# Altium PCB SpinASM_single.PcbDoc
Units mm, origin at the board's own origin, x right, y up, seen from the top; angles counter-clockwise.
Board outline 49.03 x 19.5 mm, 2 copper layers (Top Layer, Bottom Layer), stack 1.57 mm thick; 27 components, 24 nets, 120 pads, 102 vias.
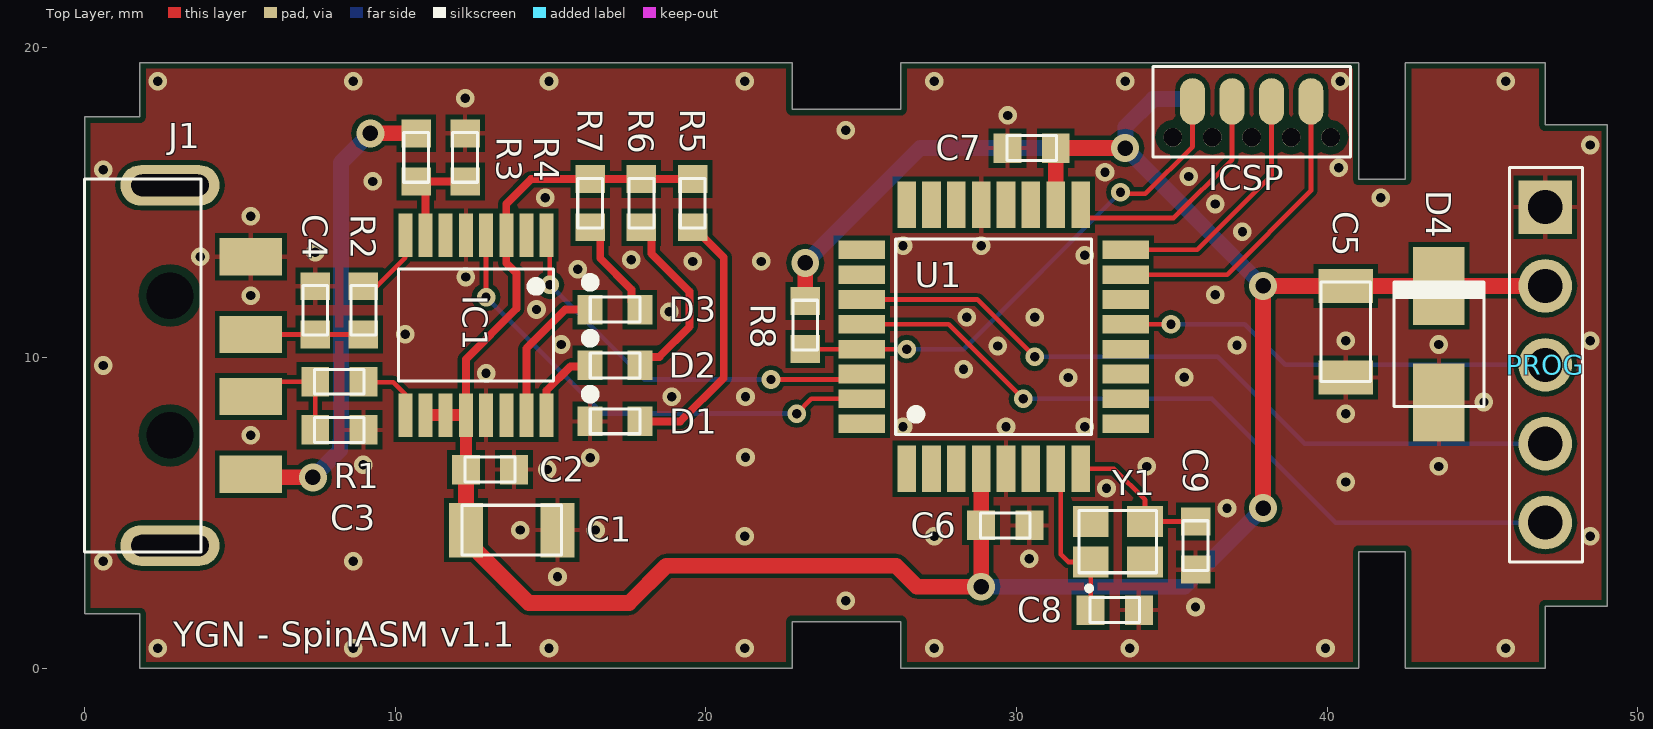
[diagram p0: Top Layer view]
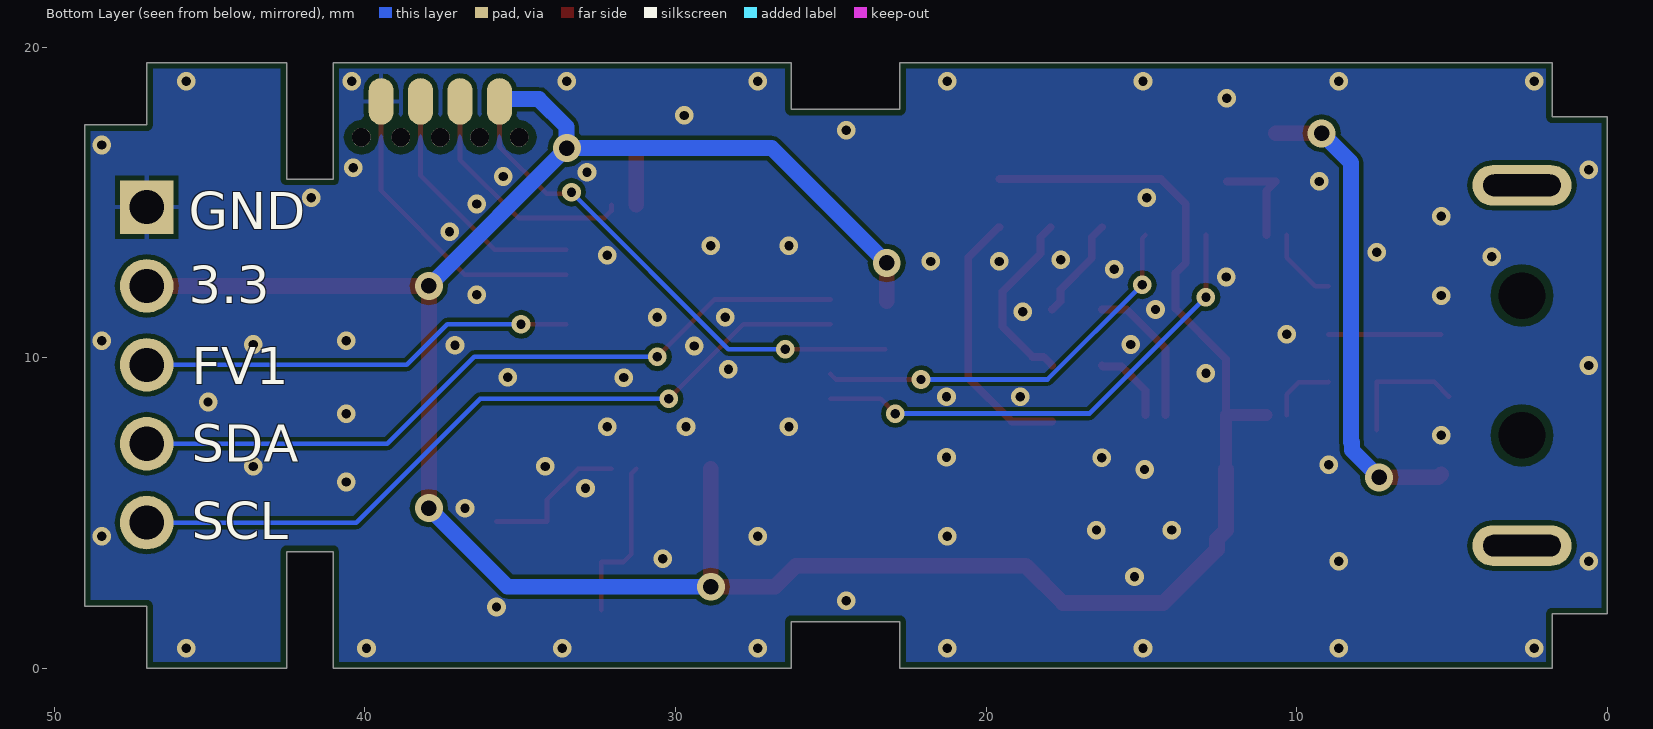
[diagram p1: Bottom Layer view, seen from below]
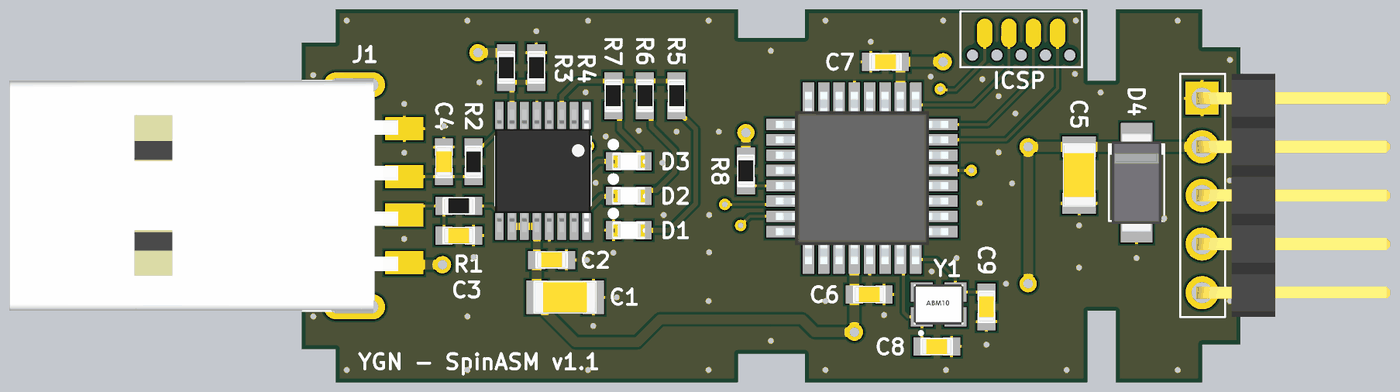
[diagram p2: 3D render of the assembled board from above, using the file's embedded part models]

## Layer stack, top to bottom
Top Solder: solder mask 0.0127, Solder Resist, Dk 3.8
Top Layer: signal copper 0.035
Dielectric: core 1.5, FR-4, Dk 4.5
Bottom Layer: signal copper 0.035
Bottom Solder: solder mask 0.0127, Solder Resist, Dk 3.8

## Board outline
22.775,19.5 22.775,18 26.275,18 26.275,19.5 41.025,19.5 41.025,15.75 42.525,15.75 42.525,19.5 47.025,19.5 47.025,17.5 49.025,17.5 49.025,2 47.025,2 47.025,0 42.525,0 42.525,3.75 41.025,3.75 41.025,0 26.275,0 26.275,1.5 22.775,1.5 22.775,0 1.775,0 1.775,1.75 0,1.75 0,17.75 1.775,17.75 1.775,19.5

## Design rules (kind name [scope] priority, off if disabled: settings)
BoardOutlineClearance [All] p1: gap=0.2 ignorepadtopadclearanceinfootprint=FALSE
Clearance [All] p1: gap=0.127 ignorepadtopadclearanceinfootprint=FALSE except(0: Arc-Text Track-Text SMDPad-Text THPad-Text Via-Text Fill-Text Poly-Text Region-Text Text-Text; 0.152: SMDPad-Fill SMDPad-Poly SMDPad-Region THPad-Fill THPad-Poly THPad-Region Via-Fill Via-Poly Via-Region; 0.25: Arc-Hole Track-Hole SMDPad-Hole THPad-Hole Via-Hole Fill-Hole Poly-Hole Region-Hole Text-Hole)
ComponentClearance [All] p1: gap=0.127 collisioncheckmode=3 verticalgap=0.127 showdistances=TRUE
DiffPairsRouting [All] p1: maxlimit=0.254 minlimit=0.127 mostfreqgap=0.127 toplayer_minwidth=0.127 toplayer_maxwidth=25.4 toplayer_prefwidth=0.127 bottomlayer_minwidth=0.127 bottomlayer_maxwidth=25.4 bottomlayer_prefwidth=0.127 maxuncoupledlength=12.7
Height [All] p1: minheight=0 maxheight=1816.048 prefheight=12.7
HoleSize [All] p1: absolutevalues=TRUE maxlimit=6.3 minlimit=0.3 maxpercent=80.000 minpercent=20.000
HoleToHoleClearance [All] p1: gap=0.25 allowstackedmicrovias=FALSE
MinimumAnnularRing [All] p1: minimumring=0.076
MinimumSolderMaskSliver [All] p1: minsoldermaskwidth=0
PlaneClearance [All] p1: clearance=0.152
PlaneConnect PlaneConnectPowerPads [InPadClass('PowerPads')] p1: planeconnectstyle=Direct reliefexpansion=0.508 reliefentries=4 reliefconductorwidth=0.254 reliefairgap=0.254
PlaneConnect [All] p2: pad.planeconnectstyle=Relief pad.reliefexpansion=0.3 pad.reliefentries=4 pad.reliefconductorwidth=0.152 pad.reliefairgap=0.152 via.planeconnectstyle=Direct via.reliefexpansion=0.3 via.reliefentries=4 via.reliefconductorwidth=0.127 via.reliefairgap=0.127
PolygonConnect PolygonConnectPowerPads [All vs (InPadClass('PowerPads'))] p1: connectstyle=Direct reliefconductorwidth=0.254 reliefentries=4 polygonreliefangle="90 Angle" airgapwidth=0.254
PolygonConnect [All] p2: thpad.connectstyle=Relief thpad.reliefconductorwidth=0.152 thpad.reliefentries=4 thpad.polygonreliefangle="90 Angle" thpad.airgapwidth=0.152 smdpad.connectstyle=Relief smdpad.reliefconductorwidth=0.152 smdpad.reliefentries=4 smdpad.polygonreliefangle="90 Angle" smdpad.airgapwidth=0.152 via.connectstyle=Direct via.reliefconductorwidth=0.127 via.reliefentries=4 via.polygonreliefangle="90 Angle" via.airgapwidth=0.127
RoutingVias [All] p1: holewidth=0.3 width=0.6 viastyle="Through Hole" minholewidth=0.3 minwidth=0.6 maxholewidth=0.6 maxwidth=6.6
SilkToSilkClearance [All] p1 off: silktosilkclearance=0
SilkToSolderMaskClearance [IsPad] p1 off: minsilkscreentomaskgap=0.127 clearancetoexposedcopper=TRUE
SolderMaskExpansion [All] p1: expansion=0.075 istentingtop=FALSE
Width [All] p1: maxlimit=0.508 minlimit=0.127 preferedwidth=0.127 minimp=50.000000 maximp=50.000000 favimp=50.000000
20 further rules are at their usual default settings.

## Components (designator, comment, footprint, x,y, rotation, side; value= is the part's Value field where it differs from the comment)
C1 "10u" CHIP_1206 13.75,4.45 r180 top
C2 "100n" CHIP_0603 13.05,6.4 r0 top
C3 "47p" CHIP_0603 8.2,7.675 r0 top
C4 "47p" CHIP_0603 7.425,11.525 r90 top
C5 "10u" CHIP_1206 40.6,10.835 r90 top
C6 "100n" CHIP_0603 29.64,4.6 r0 top
C7 "100n" CHIP_0603 30.49,16.75 r180 top
C8 "22p" CHIP_0603 33.165,1.875 r0 top
C9 "22p" CHIP_0603 35.765,3.95 r270 top
D1 "GREEN" LED_0603 17.075,7.95 r0 top
D2 "RED" LED_0603 17.075,9.75 r0 top
D3 "RED" LED_0603 17.075,11.55 r0 top
D4 "S1A" DO214 43.6,10.435 r270 top
IC1 "FT230X" TSSOP-16 12.6,11.05 r270 top
ICSP "J_SOICBITE" SOICBITE 37.575,19 r180 top
J1 "USB_MALE" USB_MALE 3.025,9.75 r270 top locked
PROG "10129379-905001BLF" HEADER_5PINS_MALE_90 47.025,14.85 r270 top locked
R1 "27R" CHIP_R_0603 8.2,9.225 r0 top
R2 "27R" CHIP_R_0603 8.975,11.525 r90 top
R3 "4.7k" CHIP_R_0603 10.675,16.45 r90 top
R4 "10k" CHIP_R_0603 12.25,16.45 r270 top
R5 "330R" CHIP_R_0603 19.575,14.975 r270 top
R6 "330R" CHIP_R_0603 17.925,14.975 r270 top
R7 "330R" CHIP_R_0603 16.275,14.975 r270 top
R8 "10k" CHIP_R_0603 23.2,11.05 r270 top
U1 "ATMEGA328PB" TQFP32 29.265,10.675 r90 top
Y1 "ABM10" ABM10-167 33.265,4.075 r0 top

## Footprints (in the part's own frame and the unit in brackets; to place one, negate y for a bottom-side part, rotate by r counter-clockwise, add the part's x,y. Pads: shape width x height; smd on the part's side, far side on the other; paste and mask are expansions set on the pad)
ABM10-167 [mm]
  rect 1.15x1 smd: 1(-0.875,-0.65) 2(0.875,0.65) ""(-0.875,0.65) ""(0.875,-0.65)
  silkscreen extent -1.25,-1.56 1.25,1, body extent -1.3,-1.05 1.3,1.05, height 0.7
CHIP_0603 [mm] "Chip Capacitor, 2-Leads, Body 1.60x0.80mm, IPC Medium Density"
  rect 0.9x0.95 smd: 1(-0.775,0) 2(0.775,0)
  silkscreen extent -0.8,-0.4 0.8,0.4, body extent -0.75,-0.4 0.75,0.4, height 0.65
CHIP_1206 [mm] "Chip Capacitor, 2-Leads, Body 3.20x1.60mm, IPC Medium Density"
  rect 1.1x1.75 smd: 1(-1.475,0) 2(1.475,0)
  silkscreen extent -1.6,-0.8 1.6,0.8, body extent -1.6,-0.8 1.6,0.8, height 1.05
CHIP_R_0603 [mm] "Chip Resistor, 2-Leads, Body 1.60x0.80mm, IPC Medium Density"
  rect 0.9x0.95 smd: 1(-0.775,0) 2(0.775,0)
  silkscreen extent -0.8,-0.4 0.8,0.4, body extent -0.75,-0.4 0.75,0.4, height 0.63
DO214 [mm] "Molded Diode, 2-Leads, Body 4.30x2.63mm, IPC Medium Density"
  rect 2.5x1.65 smd: 1(-1.875,0) 2(1.875,0)
  silkscreen extent -2,-1.45 2,1.45, body extent -2.6,-1.3 2.6,1.3, height 2.4
HEADER_5PINS_MALE_90 [mm]
  rect 1.725x1.725 hole 1.1: 1(0,0)
  round 1.725 hole 1.1: 2(2.54,0) 3(5.08,0) 4(7.62,0) 5(10.16,0)
  silkscreen extent -1.27,-1.14 11.43,1.2, body extent -1.27,-0.3 11.43,9.83, height 2.51
LED_0603 [mm]
  rect 0.8x0.95 smd: 1(-0.8,0) 2(0.8,0)
  silkscreen extent -0.9,-0.4 0.81,0.97, body extent -0.8,-0.38 0.85,0.35, height 0.68
SOICBITE [mm]
  rrect100% 0.8x1.5 smd paste-999: 1(1.905,0.75) 2(0.635,0.75) 3(-0.635,0.75) 4(-1.905,0.75)
  rrect100% 0.8x1.5 smd far side: 5(-1.905,0.75) 6(-0.635,0.75) 7(0.635,0.75)
  rrect100% 0.8x1.5 smd far side paste+0: 8(1.905,0.75)
  round 0.6 hole 0.6 unplated: MH1(-2.54,1.905) MH2(-1.27,1.905) MH3(0,1.905) MH4(1.27,1.905) MH5(2.54,1.905)
  silkscreen extent -3.18,-0.38 3.17,2.54
TQFP32 [mm]
  rect 1.5x0.6 smd: 1(-4.25,2.8) 2(-4.25,2) 3(-4.25,1.2) 4(-4.25,0.4) 5(-4.25,-0.4) 6(-4.25,-1.2) 7(-4.25,-2) 8(-4.25,-2.8) 17(4.25,-2.8) 18(4.25,-2) 19(4.25,-1.2) 20(4.25,-0.4) 21(4.25,0.4) 22(4.25,1.2) 23(4.25,2) 24(4.25,2.8)
  rect 0.6x1.5 smd: 9(-2.8,-4.25) 10(-2,-4.25) 11(-1.2,-4.25) 12(-0.4,-4.25) 13(0.4,-4.25) 14(1.2,-4.25) 15(2,-4.25) 16(2.8,-4.25) 25(2.8,4.25) 26(2,4.25) 27(1.2,4.25) 28(0.4,4.25) 29(-0.4,4.25) 30(-1.2,4.25) 31(-2,4.25) 32(-2.8,4.25)
  silkscreen extent -3.15,-3.15 3.15,3.15, body extent -4.5,-4.5 4.5,4.5, height 1.2
TSSOP-16 [mm] "TSOP, 16-Leads, Body 4.95x4.35mm, Pitch 0.65mm, IPC Medium Density"
  rect 1.4x0.45 smd: 1(-2.9,2.275) 2(-2.9,1.625) 3(-2.9,0.975) 4(-2.9,0.325) 5(-2.9,-0.325) 6(-2.9,-0.975) 7(-2.9,-1.625) 8(-2.9,-2.275) 9(2.9,-2.275) 10(2.9,-1.625) 11(2.9,-0.975) 12(2.9,-0.325) 13(2.9,0.325) 14(2.9,0.975) 15(2.9,1.625) 16(2.9,2.275)
  silkscreen extent -1.8,-2.5 1.8,2.5, body extent -3.2,-2.5 3.2,2.5, height 1.2
USB_MALE [mm]
  rect 1.2x2 smd paste-99: 1(3.5,2.325) 2(1,2.325) 3(-1,2.325) 4(-3.5,2.325)
  oval 1.3x3.2 hole 0.7 slot 2.5 at 90 deg: 5(-5.8,-0.275) 5(5.8,-0.275)
  round 0.6 hole 1.5 unplated: ""(-2.25,-0.275) ""(2.25,-0.275)
  silkscreen extent -6,-3.03 6,0.72, body extent -6.23,-18.28 6.2,3.33, height 4

## Part data
C1 C5: library part TMK316B7106KL-TD, "CAP CER 10uF 25V X7R 1206", Capacitance=10uF, Case Code (Imperial)=1206, Case Code (Metric)=3216, Dielectric=X7R, Manufacturer="Taiyo Yuden", Max Operating Temperature=125°C, Min Operating Temperature=-55°C, Package Quantity=1, Resistor Type=Ceramic, Supplier Part Number 1=2113073, Tolerance=10%, Voltage Rating=25V, Case/Package=1206, Category="Ceramic Capacitors", ComponentLink1Description=https://datasheet.ciiva.com/15922/582tmk316ab7106kl-t-15922403.pdf?src-supplier=Onlinecomponents.com, ComponentLink1URL=https://datasheet.ciiva.com/15922/582tmk316ab7106kl-t-15922403.pdf?src-supplier=Onlinecomponents.com, ComponentLink2Description=https://datasheet.ciiva.com/7975/1784422-7975593.pdf?src-supplier=Element14, ComponentLink2URL=https://datasheet.ciiva.com/7975/1784422-7975593.pdf?src-supplier=Element14, ComponentLink3Description=https://datasheet.ciiva.com/30123/25tmk316ab7106kl-t-30123726.pdf?src-supplier=Onlinecomponents.com, ComponentLink3URL=https://datasheet.ciiva.com/30123/25tmk316ab7106kl-t-30123726.pdf?src-supplier=Onlinecomponents.com, ComponentLink4Description=https://datasheet.ciiva.com/7975/mlcc-all-e-7975834.pdf?src-supplier=Element14, ComponentLink4URL=https://datasheet.ciiva.com/7975/mlcc-all-e-7975834.pdf?src-supplier=Element14, ComponentLink5Description=https://datasheet.ciiva.com/139/mlcc-all-e-139531.pdf?src-supplier=Digi-Key, ComponentLink5URL=https://datasheet.ciiva.com/139/mlcc-all-e-139531.pdf?src-supplier=Digi-Key, ComponentLink6Description=https://datasheet.ciiva.com/22748/1481447-22748971.pdf?src-supplier=Element14, ComponentLink6URL=https://datasheet.ciiva.com/22748/1481447-22748971.pdf?src-supplier=Element14, ComponentLink7Description=https://datasheet.ciiva.com/139/mlcc-all-e-139532.pdf?src-supplier=Digi-Key, ComponentLink7URL=https://datasheet.ciiva.com/139/mlcc-all-e-139532.pdf?src-supplier=Digi-Key, ComponentLink8Description=https://datasheet.ciiva.com/139/mlcc-all-e-139533.pdf?src-supplier=Digi-Key, ComponentLink8URL=https://datasheet.ciiva.com/139/mlcc-all-e-139533.pdf?src-supplier=Digi-Key, Height=1.6mm, Length=0.126inch, Manufacturer Part Number=TMK316B7106KL-TD, Mount="Surface Mount", Number of Pins=2, Packaging="Tape and Reel", Price=0.149, REACH SVHC=Unknown, RoHS=Yes, Stock=588931, Supplier 1=Farnell, Termination=SMD/SMT, Thickness=0.071inch, Voltage Rating (DC)=25V, Weight=0.000571oz, Width=1.6mm
C2 C6 C7: library part MC0603B104K500CT, "CAP CER 100NF 50V X7R 0603", Capacitance=100nF, Case Code (Imperial)=0603, Case Code (Metric)=1608, Dielectric=X7R, Manufacturer=Multicomp, Max Operating Temperature=125°C, Min Operating Temperature=-55°C, Supplier Part Number 1=1759122, Tolerance=10%, Voltage Rating=50V, Case/Package=0603, ComponentLink1Description=https://datasheet.ciiva.com/22686/1901289-22686278.pdf?src-supplier=Element14, ComponentLink1URL=https://datasheet.ciiva.com/22686/1901289-22686278.pdf?src-supplier=Element14, ComponentLink2Description=https://datasheet.ciiva.com/22686/1901289-22686279.pdf?src-supplier=Element14, ComponentLink2URL=https://datasheet.ciiva.com/22686/1901289-22686279.pdf?src-supplier=Element14, ComponentLink3Description=https://datasheet.ciiva.com/22648/1901289-22648411.pdf?src-supplier=Element14, ComponentLink3URL=https://datasheet.ciiva.com/22648/1901289-22648411.pdf?src-supplier=Element14, Manufacturer Part Number=MC0603B104K500CT, Number of Pins=2, Packaging="Cut Tape", Price=0.0458, REACH SVHC=Unknown, RoHS=Yes, Stock 1=1057763, Supplier 1=Farnell, Voltage Rating (DC)=50V
C3 C4: library part MC0603N470J500CT, "CAP CER 47PF 50V C0G/NP0 0603", Capacitance=47pF, Case Code (Imperial)=0603, Case Code (Metric)=1608, Dielectric=C0G, Manufacturer=Multicomp, Max Operating Temperature=125°C, Min Operating Temperature=-55°C, Supplier Part Number 1=1759062, Temperature Coefficient=30ppm/°C, Tolerance=5%, Voltage Rating=50V, Case/Package=0603, ComponentLink1Description=https://datasheet.ciiva.com/22648/1901289-22648503.pdf?src-supplier=Element14, ComponentLink1URL=https://datasheet.ciiva.com/22648/1901289-22648503.pdf?src-supplier=Element14, ComponentLink2Description=https://datasheet.ciiva.com/22682/1901289-22682812.pdf?src-supplier=Element14, ComponentLink2URL=https://datasheet.ciiva.com/22682/1901289-22682812.pdf?src-supplier=Element14, ComponentLink3Description=https://datasheet.ciiva.com/22682/1901289-22682813.pdf?src-supplier=Element14, ComponentLink3URL=https://datasheet.ciiva.com/22682/1901289-22682813.pdf?src-supplier=Element14, Manufacturer Part Number=MC0603N470J500CT, Number of Pins=2, Packaging="Tape and Reel", Price=0.02, Pricing="10=0.0246, 100=0.0199, 500=0.0123, 1000=0.0097, 2000=0.0089 (EUR)", REACH SVHC=Unknown, RoHS=Yes, Stock=148629, Supplier 1=Farnell, Voltage Rating (DC)=50V, Width=0.8mm
C8 C9: library part MC0603N220J500CT, "CAP CER 22PF 50V C0G/NP0 0603", Capacitance=22pF, Case Code (Imperial)=0603, Case Code (Metric)=1608, Dielectric=C0G, Manufacturer=Multicomp, Max Operating Temperature=125°C, Min Operating Temperature=-55°C, Supplier Part Number 1=1759057, Temperature Coefficient=30ppm/°C, Tolerance=5%, Voltage Rating=50V, Case/Package=0603, Category="Ceramic Capacitors", ComponentLink1Description=https://datasheet.ciiva.com/22648/1901289-22648486.pdf?src-supplier=Element14, ComponentLink1URL=https://datasheet.ciiva.com/22648/1901289-22648486.pdf?src-supplier=Element14, Manufacturer Part Number=MC0603N220J500CT, Number of Pins=2, Packaging="Cut Tape", Price=0.024, REACH SVHC=Unknown, RoHS=Yes, Stock=53792, Supplier 1=Farnell, Voltage Rating (DC)=50V, Width=0.8mm
D1: library part APT1608SGC, "LED GREEN CLEAR CHIP SMD", Case Code (Imperial)=0603, Case Code (Metric)=1608, Color=Green, Forward Current=20mA, Forward Voltage=2.2V, Lens Color=Clear, Manufacturer=Kingbright, Max Operating Temperature=85°C, Min Operating Temperature=-40°C, Package Quantity=2000, Supplier Part Number 1=604-APT1608SGC, Case/Package=0603, Category=LEDs, ComponentLink1Description=https://datasheet.ciiva.com/2113/apt1608sgc-2113808.pdf?src-supplier=Digi-Key, ComponentLink1URL=https://datasheet.ciiva.com/2113/apt1608sgc-2113808.pdf?src-supplier=Digi-Key, ComponentLink2Description=https://datasheet.ciiva.com/12400/apt1608sgc-32861-12400932.pdf?src-supplier=Mouser, ComponentLink2URL=https://datasheet.ciiva.com/12400/apt1608sgc-32861-12400932.pdf?src-supplier=Mouser, ComponentLink3Description=https://datasheet.ciiva.com/14603/70062839-14603927.pdf?src-supplier=Allied+Electronics, ComponentLink3URL=https://datasheet.ciiva.com/14603/70062839-14603927.pdf?src-supplier=Allied+Electronics, Dominant Wavelength=568nm, Height=0.75mm, Illumination Color=Green, Lead Free="Lead Free", Length=1.6mm, Lens Style=Clear,Flat, Luminous Intensity=15mcd, Manufacturer Part Number=APT1608SGC, Mount="Surface Mount", Number of LEDs=1, Number of Pins=2, Packaging="Tape and Reel", Price=0.047, Pricing="1=0.17000, 10=0.10700, 100=0.05600, 1000=0.05100, 2000=0.04400, 10000=0.03700 (USD)", RoHS=Yes, Stock=233491, Supplier 1=Mouser, Test Current=20mA, Viewing Angle=120°, Wavelength=568nm, Width=0.8mm
D2 D3: library part APT1608EC, "LED RED CLEAR CHIP SMD", Case Code (Imperial)=0603, Case Code (Metric)=1608, Color=Red, Forward Current=20mA, Forward Voltage=2V, Lens Color=Clear, Manufacturer=Kingbright, Max Operating Temperature=85°C, Min Operating Temperature=-40°C, Package Quantity=2000, Supplier Part Number 1=604-APT1608EC, Case/Package=0603, Category=LEDs, ComponentLink1Description=https://datasheet.ciiva.com/2113/apt1608ec-2113818.pdf?src-supplier=Digi-Key, ComponentLink1URL=https://datasheet.ciiva.com/2113/apt1608ec-2113818.pdf?src-supplier=Digi-Key, ComponentLink2Description=https://datasheet.ciiva.com/12400/apt1608ec-34957-12400703.pdf?src-supplier=Mouser, ComponentLink2URL=https://datasheet.ciiva.com/12400/apt1608ec-34957-12400703.pdf?src-supplier=Mouser, ComponentLink3Description=https://datasheet.ciiva.com/2113/apt1608ec-2113819.pdf?src-supplier=Digi-Key, ComponentLink3URL=https://datasheet.ciiva.com/2113/apt1608ec-2113819.pdf?src-supplier=Digi-Key, ComponentLink4Description=https://datasheet.ciiva.com/2113/apt1608ec-2113820.pdf?src-supplier=Digi-Key, ComponentLink4URL=https://datasheet.ciiva.com/2113/apt1608ec-2113820.pdf?src-supplier=Digi-Key, ComponentLink5Description=https://datasheet.ciiva.com/14604/70062836-14604396.pdf?src-supplier=Allied+Electronics, ComponentLink5URL=https://datasheet.ciiva.com/14604/70062836-14604396.pdf?src-supplier=Allied+Electronics, ComponentLink6Description=https://datasheet.ciiva.com/16412/apt1608ec-16412172.pdf?src-supplier=Future+Electronics, ComponentLink6URL=https://datasheet.ciiva.com/16412/apt1608ec-16412172.pdf?src-supplier=Future+Electronics, Dominant Wavelength=625nm, Height=0.75mm, Illumination Color=Red, Lead Free="Lead Free", Length=1.6mm, Lens Style=Clear,Flat, Luminous Intensity=12mcd, Manufacturer Part Number=APT1608EC, Mount="Surface Mount", Number of LEDs=1, Number of Pins=2, Packaging="Tape and Reel", Price=0.053, Pricing="1=0.16000, 10=0.11500, 100=0.06200, 1000=0.04300, 2000=0.03600, 10000=0.03600 (USD)", RoHS=Yes, Stock=24294, Supplier 1=Mouser, Test Current=20mA, Viewing Angle=120°, Wavelength=625nm, Width=0.8mm
D4: "DIODE GEN PURP 50V 1A SMA", Average Rectified Current=1A, Capacitance=12pF, Case/Package=SMA, Forward Voltage=1.1V, Manufacturer="ON Semiconductor / Fairchild", Max Forward Surge Current (Ifsm)=30A, Max Operating Temperature=150°C, Max Repetitive Reverse Voltage (Vrrm)=50V, Max Surge Current=40A, Min Operating Temperature=-55°C, Package Quantity=1, Peak Reverse Current=1uA, Power Dissipation=1.4W, Supplier Part Number 1=9843868, ComponentLink1Description=https://datasheet.ciiva.com/910/s1a-910480.pdf?src-supplier=Avnet, ComponentLink1URL=https://datasheet.ciiva.com/910/s1a-910480.pdf?src-supplier=Avnet, ComponentLink2Description=https://datasheet.ciiva.com/23683/1730038-23683616.pdf?src-supplier=Newark, ComponentLink2URL=https://datasheet.ciiva.com/23683/1730038-23683616.pdf?src-supplier=Newark, ComponentLink3Description=https://datasheet.ciiva.com/4452/s1a-191336-4452662.pdf?src-supplier=Mouser, ComponentLink3URL=https://datasheet.ciiva.com/4452/s1a-191336-4452662.pdf?src-supplier=Mouser, ComponentLink4Description=https://datasheet.ciiva.com/25624/0900766b80f9b629-25624903.pdf?src-supplier=RSComponents, ComponentLink4URL=https://datasheet.ciiva.com/25624/0900766b80f9b629-25624903.pdf?src-supplier=RSComponents, ComponentLink5Description=https://datasheet.ciiva.com/916/s1a-916898.pdf?src-supplier=Digi-Key, ComponentLink5URL=https://datasheet.ciiva.com/916/s1a-916898.pdf?src-supplier=Digi-Key, ComponentLink6Description=https://datasheet.ciiva.com/916/s1a-916899.pdf?src-supplier=Digi-Key, ComponentLink6URL=https://datasheet.ciiva.com/916/s1a-916899.pdf?src-supplier=Digi-Key, ComponentLink7Description=https://datasheet.ciiva.com/916/s1a-916900.pdf?src-supplier=Digi-Key, ComponentLink7URL=https://datasheet.ciiva.com/916/s1a-916900.pdf?src-supplier=Digi-Key, ComponentLink8Description=https://datasheet.ciiva.com/16800/s1a-16800103.pdf?src-supplier=Future+Electronics, ComponentLink8URL=https://datasheet.ciiva.com/16800/s1a-16800103.pdf?src-supplier=Future+Electronics, ComponentLink9Description=https://datasheet.ciiva.com/28469/1766308-28469031.pdf?src-supplier=Element14, ComponentLink9URL=https://datasheet.ciiva.com/28469/1766308-28469031.pdf?src-supplier=Element14, ComponentLink10Description=https://datasheet.ciiva.com/26231/s1k-26231832.pdf?src-supplier=Avnet+Europe, ComponentLink10URL=https://datasheet.ciiva.com/26231/s1k-26231832.pdf?src-supplier=Avnet+Europe, ComponentLink11Description=https://datasheet.ciiva.com/16474/s1k-16474283.pdf?src-supplier=Avnet+Asia, ComponentLink11URL=https://datasheet.ciiva.com/16474/s1k-16474283.pdf?src-supplier=Avnet+Asia, Contact Plating=Tin, Current Rating=1A, Element Configuration=Single, Forward Current=1A, Lead Free="Lead Free", Manufacturer Part Number=S1A, Max Reverse Voltage (DC)=50V, Mount="Surface Mount", Number of Pins=2, Output Current=1A, Packaging="Tape and Reel", Peak Non-Repetitive Surge Current=30A, Polarity=Standard, Price=0.072, Pricing="5=0.184, 25=0.179, 100=0.0727, 250=0.0669, 500=0.0667, 1000=0.0364, 5000=0.0293 (EUR)", Radiation Hardening=No, REACH SVHC="No SVHC", Recovery Time=1800ns, Reverse Recovery Time=1.8us, Reverse Voltage=50V, RoHS=Yes, Stock=34555, Supplier 1=Farnell, Voltage Rating (DC)=50V, Weight=0.106g, Width=5.28mm
IC1: library part FT230XS-R, "USB-to-UART 1-CH 512byte FIFO 5V 16-Pin SSOP T/R", Case/Package=SSOP, Manufacturer=FTDI, Max Operating Temperature=85°C, Max Supply Voltage=5.5V, Min Operating Temperature=-40°C, Min Supply Voltage=2.97V, Operating Supply Current=8mA, Operating Supply Voltage=5V, Package Quantity=3000, Supplier Part Number 1=2081321, Category="Interface ICs", ComponentLink1Description=https://datasheet.ciiva.com/1787/ds-ft230x-1787315.pdf?src-supplier=Digi-Key, ComponentLink1URL=https://datasheet.ciiva.com/1787/ds-ft230x-1787315.pdf?src-supplier=Digi-Key, ComponentLink2Description=https://datasheet.ciiva.com/4787/ds-ft230x-5395-4787571.pdf?src-supplier=Mouser, ComponentLink2URL=https://datasheet.ciiva.com/4787/ds-ft230x-5395-4787571.pdf?src-supplier=Mouser, ComponentLink3Description=https://datasheet.ciiva.com/30478/0900766b811020cb-30478167.pdf?src-supplier=RSComponents, ComponentLink3URL=https://datasheet.ciiva.com/30478/0900766b811020cb-30478167.pdf?src-supplier=RSComponents, ComponentLink4Description=https://datasheet.ciiva.com/1787/ft-x-series-1787316.pdf?src-supplier=Digi-Key, ComponentLink4URL=https://datasheet.ciiva.com/1787/ft-x-series-1787316.pdf?src-supplier=Digi-Key, ComponentLink5Description=https://datasheet.ciiva.com/1787/ft-x-series-1787317.pdf?src-supplier=Digi-Key, ComponentLink5URL=https://datasheet.ciiva.com/1787/ft-x-series-1787317.pdf?src-supplier=Digi-Key, Data Rate=12Mbps, Height=0.059inch, Interface=UART,USB, Length=5mm, Manufacturer Part Number=FT230XS-R, Mount="Surface Mount", Number of Channels=1, Number of Pins=16, Packaging="Tape and Reel", Price=1.73, RoHS=Yes, Stock 1=45264, Supplier 1=Farnell, Weight=0.004586oz, Width=0.157inch
ICSP: Package=SOICBITE, DeviceSetName=SOICBITE, GateName_1=G$1, LibraryName=SOICbite_Eagle, SymbolName_1=SOICBITE
J1: library part KUSBX-SMT2AP5S-W, "Conn USB Type A PL 4 POS 2mm Solder ST SMD 4 Terminal 1 Port", Color=Black, Current Rating=1A, Flammability Rating="UL94 V-0", Insulation Resistance=1GR, Manufacturer=Kycon, Package Quantity=100, Category="USB Connectors", ComponentLink1Description=https://datasheet.ciiva.com/12494/kusbx-371999-12494840.pdf?src-supplier=Mouser, ComponentLink1URL=https://datasheet.ciiva.com/12494/kusbx-371999-12494840.pdf?src-supplier=Mouser, Connector Type=USB,Plug, Contact Material=Bronze, Contact Plating=Gold, Gender=Male, Housing Material=Thermoplastic, Manufacturer Part Number=KUSBX-SMT2AP5S-W, Mount="Surface Mount", Number of Contacts=4, Number of Ports=1, Number of Positions=4, Orientation=Straight, Packaging=Tray, Pitch=2mm, Price=0.735, Radiation Hardening=No, RoHS=Yes, Stock 1=8377, Supplier 1=Mouser, Termination=SMD/SMT
PROG: "Conn Unshrouded Header HDR 5 POS 2.54mm Solder RA Thru-Hole Poly Bag", Manufacturer=ICC, Supplier Part Number 1=649-1012937990501BLF, ComponentLink1Description=http://datasheet.octopart.com/10129379-905001BLF-Amphenol-ICC-datasheet-100454231.pdf?src-supplier=Newark, ComponentLink1URL=http://datasheet.octopart.com/10129379-905001BLF-Amphenol-ICC-datasheet-100454231.pdf?src-supplier=Newark, ComponentLink2Description=http://datasheet.octopart.com/10129379-905001BLF-ICC-datasheet-100454231.pdf?src-supplier=Newark, ComponentLink2URL=http://datasheet.octopart.com/10129379-905001BLF-ICC-datasheet-100454231.pdf?src-supplier=Newark, Manufacturer Part Number=10129379-905001BLF, Price=0.154, Pricing="1=0.26000, 10=0.18200, 100=0.15000, 1000=0.12500, 2500=0.11200, 10000=0.09600, 25000=0.09500, 50000=0.09300, 100000=0.08900 (USD)", Stock=5866, Supplier 1=Mouser
R1 R2: library part CRCW060327R0FKEA, "RES SMD 27 OHM 1% 1/10W 0603", Case Code (Imperial)=0603, Case Code (Metric)=1608, Manufacturer=Vishay, Max Operating Temperature=155°C, Min Operating Temperature=-55°C, Package Quantity=5000, Power Rating=100mW, Supplier Part Number 1=2141211, Temperature Coefficient=100ppm/°C, Tolerance=1%, Voltage Rating=75V, Case/Package=0603, Category="Chip SMD Resistors", ComponentLink1Description=https://datasheet.ciiva.com/11809/0900766b80d98afc-11809194.pdf?src-supplier=RSComponents, ComponentLink1URL=https://datasheet.ciiva.com/11809/0900766b80d98afc-11809194.pdf?src-supplier=RSComponents, ComponentLink2Description=https://datasheet.ciiva.com/5541/dcrcwe3-109170-5541782.pdf?src-supplier=Mouser, ComponentLink2URL=https://datasheet.ciiva.com/5541/dcrcwe3-109170-5541782.pdf?src-supplier=Mouser, ComponentLink3Description=https://datasheet.ciiva.com/7792/125364-7792167.pdf?src-supplier=Element14, ComponentLink3URL=https://datasheet.ciiva.com/7792/125364-7792167.pdf?src-supplier=Element14, ComponentLink4Description=https://datasheet.ciiva.com/22704/1697337-22704440.pdf?src-supplier=Element14, ComponentLink4URL=https://datasheet.ciiva.com/22704/1697337-22704440.pdf?src-supplier=Element14, ComponentLink5Description=https://datasheet.ciiva.com/7672/1697337-7672889.pdf?src-supplier=Element14, ComponentLink5URL=https://datasheet.ciiva.com/7672/1697337-7672889.pdf?src-supplier=Element14, ComponentLink6Description=https://datasheet.ciiva.com/7672/1697337-7672890.pdf?src-supplier=Element14, ComponentLink6URL=https://datasheet.ciiva.com/7672/1697337-7672890.pdf?src-supplier=Element14, ComponentLink7Description=https://datasheet.ciiva.com/16882/dcrcwe3-16882811.pdf?src-supplier=Avnet+Europe, ComponentLink7URL=https://datasheet.ciiva.com/16882/dcrcwe3-16882811.pdf?src-supplier=Avnet+Europe, ComponentLink8Description=https://datasheet.ciiva.com/22870/70201119-22870860.pdf?src-supplier=Allied+Electronics, ComponentLink8URL=https://datasheet.ciiva.com/22870/70201119-22870860.pdf?src-supplier=Allied+Electronics, ComponentLink9Description=https://datasheet.ciiva.com/16498/dcrcwe3-16498302.pdf?src-supplier=Future+Electronics, ComponentLink9URL=https://datasheet.ciiva.com/16498/dcrcwe3-16498302.pdf?src-supplier=Future+Electronics, ComponentLink10Description=https://datasheet.ciiva.com/16780/70201119-16780479.pdf?src-supplier=Allied+Electronics, ComponentLink10URL=https://datasheet.ciiva.com/16780/70201119-16780479.pdf?src-supplier=Allied+Electronics, Composition="Thick Film", Contact Plating=Tin, Depth=0.85mm, Height=0.45mm, Lead Free="Lead Free", Length=1.55mm, Manufacturer Part Number=CRCW060327R0FKEA, Military Standard=Not, Mount="Surface Mount", Number of Pins=2, Packaging="Tape and Reel", Price=0.0165, Radiation Hardening=No, REACH SVHC=Unknown, Resistance=27R, RoHS=Yes, Stock 1=1183, Supplier 1=Farnell, Termination=SMD/SMT, Voltage Rating (DC)=75V, Weight=7.1E-05oz, Width=0.85mm
R3: library part CRCW06034K70FKEA, "RES SMD 4.7K OHM 1% 1/10W 0603", Case Code (Imperial)=0603, Case Code (Metric)=1608, Manufacturer=Vishay, Max Operating Temperature=155°C, Min Operating Temperature=-55°C, Package Quantity=5000, Power Rating=100mW, Resistance=4.7kR, Supplier Part Number 1=1469807, Temperature Coefficient=100ppm/°C, Tolerance=1%, Voltage Rating=75V, Case/Package=0603, ComponentLink1Description=https://datasheet.ciiva.com/11809/0900766b80d98afc-11809859.pdf?src-supplier=RSComponents, ComponentLink1URL=https://datasheet.ciiva.com/11809/0900766b80d98afc-11809859.pdf?src-supplier=RSComponents, ComponentLink2Description=https://datasheet.ciiva.com/8079/1697337-8079646.pdf?src-supplier=Element14, ComponentLink2URL=https://datasheet.ciiva.com/8079/1697337-8079646.pdf?src-supplier=Element14, ComponentLink3Description=https://datasheet.ciiva.com/15159/getdatasheetpartid-33073-15159382.pdf?src-supplier=Verical, ComponentLink3URL=https://datasheet.ciiva.com/15159/getdatasheetpartid-33073-15159382.pdf?src-supplier=Verical, ComponentLink4Description=https://datasheet.ciiva.com/16199/dcrcwe3-16199366.pdf?src-supplier=Future+Electronics, ComponentLink4URL=https://datasheet.ciiva.com/16199/dcrcwe3-16199366.pdf?src-supplier=Future+Electronics, ComponentLink5Description=https://datasheet.ciiva.com/16764/70201119-16764918.pdf?src-supplier=Allied+Electronics, ComponentLink5URL=https://datasheet.ciiva.com/16764/70201119-16764918.pdf?src-supplier=Allied+Electronics, ComponentLink6Description=https://datasheet.ciiva.com/16520/dcrcwe3-16520616.pdf?src-supplier=Avnet+Asia, ComponentLink6URL=https://datasheet.ciiva.com/16520/dcrcwe3-16520616.pdf?src-supplier=Avnet+Asia, ComponentLink7Description=https://datasheet.ciiva.com/16724/70201119-16724106.pdf?src-supplier=Allied+Electronics, ComponentLink7URL=https://datasheet.ciiva.com/16724/70201119-16724106.pdf?src-supplier=Allied+Electronics, ComponentLink8Description=https://datasheet.ciiva.com/26314/fld-crcw-e3-data-en-26314735.pdf?src-supplier=Distrelec, ComponentLink8URL=https://datasheet.ciiva.com/26314/fld-crcw-e3-data-en-26314735.pdf?src-supplier=Distrelec, Composition="Thick Film", Contact Plating=Tin, Depth=0.85mm, Height=0.45mm, Lead Free="Lead Free", Length=1.55mm, Manufacturer Part Number=CRCW06034K70FKEA, Military Standard=Not, Mount="Surface Mount", Packaging="Tape and Reel", Price=0.0131, Pricing="10=0.0169, 100=0.013, 500=0.0113, 1000=0.0074 (EUR)", REACH SVHC=Unknown, RoHS=Yes, Stock=238464, Supplier 1=Farnell, Termination=SMD/SMT, Voltage Rating (DC)=75V, Weight=7.1E-05oz, Width=0.85mm
R4 R8: library part CRCW060310K0FKEA, "RES SMD 10K OHM 1% 1/10W 0603", Case Code (Imperial)=0603, Case Code (Metric)=1608, Manufacturer=Vishay, Max Operating Temperature=155°C, Max Power Dissipation=100mW, Min Operating Temperature=-55°C, Package Quantity=10, Resistance=10kR, Supplier Part Number 1=1469748, Temperature Coefficient=100ppm/°C, Tolerance=1%, Voltage Rating=75V, Case/Package=0603, ComponentLink1Description=https://datasheet.ciiva.com/11809/0900766b80d98afc-11809037.pdf?src-supplier=RSComponents, ComponentLink1URL=https://datasheet.ciiva.com/11809/0900766b80d98afc-11809037.pdf?src-supplier=RSComponents, ComponentLink2Description=https://datasheet.ciiva.com/16886/dcrcw-16886037.pdf?src-supplier=Avnet+Europe, ComponentLink2URL=https://datasheet.ciiva.com/16886/dcrcw-16886037.pdf?src-supplier=Avnet+Europe, ComponentLink3Description=https://datasheet.ciiva.com/26821/getdatasheetpartid-86831-26821109.pdf?src-supplier=Verical, ComponentLink3URL=https://datasheet.ciiva.com/26821/getdatasheetpartid-86831-26821109.pdf?src-supplier=Verical, ComponentLink4Description=https://datasheet.ciiva.com/16754/70201119-16754710.pdf?src-supplier=Allied+Electronics, ComponentLink4URL=https://datasheet.ciiva.com/16754/70201119-16754710.pdf?src-supplier=Allied+Electronics, ComponentLink5Description=https://datasheet.ciiva.com/16719/70201119-16719704.pdf?src-supplier=Allied+Electronics, ComponentLink5URL=https://datasheet.ciiva.com/16719/70201119-16719704.pdf?src-supplier=Allied+Electronics, ComponentLink6Description=https://datasheet.ciiva.com/2465/dcrcwe3-2465513.pdf?src-supplier=Digi-Key, ComponentLink6URL=https://datasheet.ciiva.com/2465/dcrcwe3-2465513.pdf?src-supplier=Digi-Key, ComponentLink7Description=https://datasheet.ciiva.com/5543/dcrcwe3-109170-5543001.pdf?src-supplier=Mouser, ComponentLink7URL=https://datasheet.ciiva.com/5543/dcrcwe3-109170-5543001.pdf?src-supplier=Mouser, ComponentLink8Description=https://datasheet.ciiva.com/2465/dcrcwe3-2465514.pdf?src-supplier=Digi-Key, ComponentLink8URL=https://datasheet.ciiva.com/2465/dcrcwe3-2465514.pdf?src-supplier=Digi-Key, ComponentLink9Description=https://datasheet.ciiva.com/46385/1697337-46385498.pdf?src-supplier=Element14, ComponentLink9URL=https://datasheet.ciiva.com/46385/1697337-46385498.pdf?src-supplier=Element14, ComponentLink10Description=https://datasheet.ciiva.com/2465/dcrcwe3-2465515.pdf?src-supplier=Digi-Key, ComponentLink10URL=https://datasheet.ciiva.com/2465/dcrcwe3-2465515.pdf?src-supplier=Digi-Key, ComponentLink11Description=https://datasheet.ciiva.com/3256/dcrcwe3-3256939.pdf?src-supplier=Avnet, ComponentLink11URL=https://datasheet.ciiva.com/3256/dcrcwe3-3256939.pdf?src-supplier=Avnet, ComponentLink12Description=https://datasheet.ciiva.com/3256/dcrcwe3-3256940.pdf?src-supplier=Avnet, ComponentLink12URL=https://datasheet.ciiva.com/3256/dcrcwe3-3256940.pdf?src-supplier=Avnet, ComponentLink13Description=https://datasheet.ciiva.com/16209/dcrcwe3-16209164.pdf?src-supplier=Future+Electronics, ComponentLink13URL=https://datasheet.ciiva.com/16209/dcrcwe3-16209164.pdf?src-supplier=Future+Electronics, ComponentLink14Description=https://datasheet.ciiva.com/26314/fld-crcw-e3-data-en-26314749.pdf?src-supplier=Distrelec, ComponentLink14URL=https://datasheet.ciiva.com/26314/fld-crcw-e3-data-en-26314749.pdf?src-supplier=Distrelec, Composition="Thick Film", Contact Plating=Tin, Depth=0.85mm, Features="Automotive AEC-Q200", Height=0.45mm, Lead Free="Lead Free", Length=1.55mm, Manufacturer Part Number=CRCW060310K0FKEA, Military Standard=Not, Number of Pins=2, Number of Terminations=2, Packaging="Tape and Reel", Power Rating=100mW, Price=0.0131, Pricing="10=0.0169, 100=0.013, 500=0.0113, 1000=0.008 (EUR)", Radiation Hardening=No, REACH SVHC=Unknown, RoHS=Yes, Stock=1391124, Supplier 1=Farnell, Termination=SMD/SMT, Voltage Rating (DC)=75V, Weight=7.1E-05oz, Width=0.033inch
R5 R6 R7: library part CRCW0603330RFKEA, "RES SMD 330R OHM 1% 1/10W 0603", Case Code (Imperial)=0603, Case Code (Metric)=1608, Manufacturer=Vishay, Max Operating Temperature=155°C, Max Power Dissipation=100mW, Min Operating Temperature=-55°C, Package Quantity=10, Supplier Part Number 1=1469803, Temperature Coefficient=100ppm/°C, Tolerance=1%, Voltage Rating=75V, Case/Package=0603, Category="Chip SMD Resistors", ComponentLink1Description=https://datasheet.ciiva.com/11809/0900766b80d98afc-11809055.pdf?src-supplier=RSComponents, ComponentLink1URL=https://datasheet.ciiva.com/11809/0900766b80d98afc-11809055.pdf?src-supplier=RSComponents, ComponentLink2Description=https://datasheet.ciiva.com/2465/dcrcwe3-2465777.pdf?src-supplier=Digi-Key, ComponentLink2URL=https://datasheet.ciiva.com/2465/dcrcwe3-2465777.pdf?src-supplier=Digi-Key, ComponentLink3Description=https://datasheet.ciiva.com/2465/dcrcwe3-2465778.pdf?src-supplier=Digi-Key, ComponentLink3URL=https://datasheet.ciiva.com/2465/dcrcwe3-2465778.pdf?src-supplier=Digi-Key, ComponentLink4Description=https://datasheet.ciiva.com/2465/dcrcwe3-2465779.pdf?src-supplier=Digi-Key, ComponentLink4URL=https://datasheet.ciiva.com/2465/dcrcwe3-2465779.pdf?src-supplier=Digi-Key, ComponentLink5Description=https://datasheet.ciiva.com/5543/dcrcwe3-109170-5543013.pdf?src-supplier=Mouser, ComponentLink5URL=https://datasheet.ciiva.com/5543/dcrcwe3-109170-5543013.pdf?src-supplier=Mouser, ComponentLink6Description=https://datasheet.ciiva.com/16772/70201119-16772038.pdf?src-supplier=Allied+Electronics, ComponentLink6URL=https://datasheet.ciiva.com/16772/70201119-16772038.pdf?src-supplier=Allied+Electronics, ComponentLink7Description=https://datasheet.ciiva.com/26316/fld-crcw-e3-data-en-26316538.pdf?src-supplier=Distrelec, ComponentLink7URL=https://datasheet.ciiva.com/26316/fld-crcw-e3-data-en-26316538.pdf?src-supplier=Distrelec, ComponentLink8Description=https://datasheet.ciiva.com/15225/getdatasheetpartid-32830-15225339.pdf?src-supplier=Verical, ComponentLink8URL=https://datasheet.ciiva.com/15225/getdatasheetpartid-32830-15225339.pdf?src-supplier=Verical, ComponentLink9Description=https://datasheet.ciiva.com/16372/dcrcwe3-16372971.pdf?src-supplier=Future+Electronics, ComponentLink9URL=https://datasheet.ciiva.com/16372/dcrcwe3-16372971.pdf?src-supplier=Future+Electronics, ComponentLink10Description=https://datasheet.ciiva.com/16893/dcrcwe3-16893227.pdf?src-supplier=Avnet+Europe, ComponentLink10URL=https://datasheet.ciiva.com/16893/dcrcwe3-16893227.pdf?src-supplier=Avnet+Europe, ComponentLink11Description=https://datasheet.ciiva.com/7777/1697337-7777311.pdf?src-supplier=Element14, ComponentLink11URL=https://datasheet.ciiva.com/7777/1697337-7777311.pdf?src-supplier=Element14, Composition="Thick Film", Contact Plating=Tin, Depth=0.85mm, Features="Automotive AEC-Q200", Height=0.45mm, Lead Free="Lead Free", Length=1.55mm, Manufacturer Part Number=CRCW0603330RFKEA, Military Standard=Not, Mount="Surface Mount", Number of Terminations=2, Packaging="Tape and Reel", Power Rating=100mW, Price=0.0165, Pricing="10=0.04600, 100=0.01830, 500=0.01570, 1000=0.00710, 2500=0.00550 (EUR)", Radiation Hardening=No, REACH SVHC=Unknown, Resistance=330R, RoHS=Yes, Stock=92220, Supplier 1=Farnell, Termination=SMD/SMT, Voltage Rating (DC)=75V, Weight=7.1E-05oz, Width=0.033inch
U1: library part ATMEGA328PB-AU, "IC MCU 8BIT 32KB FLASH 32TQFP", Case/Package=TQFP, Manufacturer=Microchip, Supplier Part Number 1=2523203, Category=Microcontrollers, ComponentLink1Description=http://www.farnell.com/datasheets/2915218.pdf?src-supplier=Farnell, ComponentLink1URL=http://www.farnell.com/datasheets/2915218.pdf?src-supplier=Farnell, ComponentLink2Description=http://www.farnell.com/datasheets/2915218.pdf?src-supplier=Newark, ComponentLink2URL=http://www.farnell.com/datasheets/2915218.pdf?src-supplier=Newark, ComponentLink3Description=http://www.microchip.com/mymicrochip/filehandler.aspx?ddocname=en589666&src-supplier=Digi-Key, ComponentLink3URL=http://www.microchip.com/mymicrochip/filehandler.aspx?ddocname=en589666&src-supplier=Digi-Key, Manufacturer Part Number=ATMEGA328PB-AU, Price=1.13, RoHS=No, Stock 1=2845, Supplier 1=Farnell
Y1: library part ABM10-166-12.000MHZ-T3, "CRYSTAL 12 MHz SMD 28 pF 10 ppm", Case/Package=SMD/SMT, ESR (Equivalent Series Resistance)=125R, Frequency=12MHz, Frequency Stability=10ppm, Load Capacitance=8pF, Manufacturer=Abracon, Max Operating Temperature=70°C, Min Operating Temperature=-20°C, Supplier Part Number 1=2849406, Category=Crystals, ComponentLink1Description=http://www.farnell.com/datasheets/2581417.pdf?src-supplier=Farnell, ComponentLink1URL=http://www.farnell.com/datasheets/2581417.pdf?src-supplier=Farnell, ComponentLink2Description=https://abracon.com/Resonators/ABM10-XXX_packagedrawing.PDF?src-supplier=Digi-Key, ComponentLink2URL=https://abracon.com/Resonators/ABM10-XXX_packagedrawing.PDF?src-supplier=Digi-Key, Frequency Tolerance=10ppm, Height=0.02inch, Length=0.098inch, Manufacturer Part Number=ABM10-166-12.000MHZ-T3, Mount="Surface Mount", Packaging="Tape and Reel", Price=0.41, RoHS=Yes, Stock=5674, Supplier 1=Farnell, Width=0.079inch

## Via types
v1: diameter 0.6, hole 0.3, Top Layer to Bottom Layer, tented both sides, 86 vias
v2: diameter 0.6, hole 0.3, Top Layer to Bottom Layer, 9 vias
v3: diameter 0.9, hole 0.5, Top Layer to Bottom Layer, 7 vias

## Nets (pads, with @x,y where several pads share a name; then routed paths per layer and width w, separated by ;. In a path a pad name is that pad's centre, name@x,y a point inside that pad or via, vN(x,y) a via of type N, cw(c..) or ccw(c..) an arc to the next point about the centre after c; other vN are vias at no path point)
+3.3V: C1.2 C2.1 C5.2 C6.1 C7.1 D4.1 IC1.3 IC1.10 IC1.11 IC1.12 ICSP.8 PROG.2 R5.1 R6.1 R7.1 R8.1 U1.4 U1.18 | length 94.2
  Top Layer w0.254: IC1.12 12.275,9.95 13.9,11.575 13.9,12.725 13.575,13.05 IC1.3 13.575,14.95 14.375,15.75 R6.1 R5.1
  Top Layer w0.381: IC1.10 IC1.11 IC1.12 C2.1
  Top Layer w0.508: C2.1 C1.2 12.571,4.154 12.571,3.829 14.3,2.1 17.525,2.1 18.725,3.3 26.125,3.3 26.8,2.625 v3(28.865,2.625) C6.1 U1.4 ; R8.1 v3(23.2,13.05) ; U1.18 C7.1 v3(33.5,16.75) ; v3(37.94,5.158) v3(37.94,12.31) C5.2 D4.1 PROG.2
  Bottom Layer w0.508: v3(23.2,13.05) 26.9,16.75 v3(33.5,16.75) ; v3(28.865,2.625) 35.407,2.625 v3(37.94,5.158) ; ICSP.8@35.67,18.325 34.4,18.325 33.512,17.436 33.512,16.762 v3(33.5,16.75) ; v3(37.94,12.31) v3(33.5,16.75)
+5V: J1.1 R3.2 | length 15.4
  Top Layer w0.508: J1.1 5.45,6.15 v3(7.35,6.15) ; v3(9.2,17.225) R3.2
  Bottom Layer w0.508: v3(7.35,6.15) 8.225,7.025 8.225,7.275 8.25,7.275 8.25,16.275 v3(9.2,17.225)
FV1_RST: PROG.3 U1.13 | length 14.1
  Top Layer w0.152: U1.13 v2(34.975,11.075)
  Bottom Layer w0.152: v2(34.975,11.075) 37.35,11.075 38.655,9.77 PROG.3
GND: C1.1 C2.2 C3.2 C4.2 C5.1 C6.2 C7.2 C8.2 C9.2 D1.1 D4.2 IC1.5 IC1.13 ICSP.5 J1.4 PROG.1 R4.1 U1.5 U1.21
  other v1: 2.35,0.65 8.65,0.65 14.95,0.65 21.251,0.65 27.35,0.65 33.65,0.65 39.951,0.65 45.751,0.65 35.765,1.975 24.5,2.175 15.225,2.95 0.6,3.45 8.65,3.45 30.415,3.525 21.251,4.25 27.35,4.25 48.476,4.248 14.025,4.45 16.45,4.45 36.78,5.158 32.9,5.8 40.6,6 14.9,6.4 34.2,6.5 43.6,6.5 8.975,6.55 16.275,6.775 21.275,6.8 5.35,7.5 26.35,7.775 29.665,7.775 32.2,7.775 40.6,8.2 45.05,8.575 18.9,8.747 21.275,8.747 31.665,9.36 35.407,9.375 12.925,9.5 28.298,9.625 0.6,9.75 29.4,10.375 37.1,10.4 15.35,10.425 43.6,10.425 40.6,10.549 48.476,10.549 10.325,10.75 28.4,11.3 30.587,11.3 18.825,11.475 14.55,11.55 5.35,12 36.4,12.025 12.275,12.6 15.875,12.85 19.575,13.1 21.785,13.1 17.6,13.15 3.725,13.25 32.2,13.3 7.425,13.4 26.35,13.6 28.865,13.6 37.275,14.05 5.35,14.55 36.4,14.95 14.825,15.15 41.725,15.15 9.275,15.675 35.55,15.835 32.85,15.975 0.6,16.05 40.38,16.12 48.476,16.849 24.5,17.325 29.715,17.8 12.25,18.35 2.35,18.9 8.65,18.9 14.95,18.9 21.251,18.9 27.35,18.9 33.5,18.9 40.43,18.9 45.751,18.9
MISO: ICSP.3 U1.16 | length 8.1
  Top Layer w0.152: U1.16 35.825,13.475 38.21,15.86 ICSP.3
MOSI: ICSP.4 U1.15 | length 10
  Top Layer w0.152: U1.15 36.78,12.675 39.48,15.375 ICSP.4
NetD1_2: D1.2 R5.2 | length 8.6
  Top Layer w0.254: D1.2 19.175,7.95 20.575,9.35 20.575,13.225 19.6,14.2 R5.2
NetD2_2: D2.2 R6.2 | length 6
  Top Layer w0.254: D2.2 17.875,9.755 18.148,10.028 18.503,10.028 19.475,11 19.475,12.125 18.25,13.35 18.25,13.877 R6.2 R6.2
NetD3_2: D3.2 R7.2 | length 3.3
  Top Layer w0.254: R7.2 16.277,14.2 16.6,13.877 16.6,13.2 17.61,12.19 17.61,11.815 D3.2
NetIC1_7: IC1.7 R3.1 R4.2 | length 3.4
  Top Layer w0.254: IC1.7 10.975,15.375 R3.1 R4.2
NetIC1_8: IC1.8 R2.2 | length 2.5
  Top Layer w0.152: R2.2 9.4,12.3 10.325,13.225 IC1.8
NetIC1_9: IC1.9 R1.2 | length 2.2
  Top Layer w0.152: R1.2 8.989,9.211 9.939,9.211 10.325,8.825 IC1.9
RST: ICSP.1 R8.2 U1.29 | length 16.6
  Top Layer w0.152: R8.2@23.25,10.275 U1.29 v2(26.465,10.275) ; v2(33.35,15.327) 33.402,15.275 34.15,15.275 35.67,16.795 ICSP.1
  Bottom Layer w0.152: v2(26.465,10.275) 28.298,10.275 v2(33.35,15.327)
RX: IC1.4 U1.31 | length 15.8
  Top Layer w0.152: v2(12.925,11.95) IC1.4 ; v2(22.922,8.2) 23.397,8.675 U1.31
  Bottom Layer w0.152: v2(12.925,11.95) 16.675,8.2 v2(22.922,8.2)
RX_LED: D2.1 IC1.16 | length 2.5
  Top Layer w0.254: IC1.16 14.875,8.95 15.643,9.718 16.243,9.718 D2.1
SCK: ICSP.2 U1.17 | length 7.8
  Top Layer w0.152: U1.17 32.065,14.724 32.289,14.5 35.065,14.5 36.94,16.375 ICSP.2
SCL: PROG.5 U1.28 | length 24.7
  Top Layer w0.152: U1.28 27.825,11.075 30.215,8.685 v2(30.215,8.68)
  Bottom Layer w0.152: v2(30.215,8.68) 36.295,8.68 40.285,4.69 PROG.5
SDA: PROG.4 U1.27 | length 23.9
  Top Layer w0.152: U1.27 28.74,11.875 v2(30.587,10.028)
  Bottom Layer w0.152: v2(30.587,10.028) 36.482,10.028 39.28,7.23 PROG.4
TX: IC1.1 U1.30 | length 13.1
  Top Layer w0.152: IC1.1 14.975,13.85 v2(14.975,12.35) ; v2(22.097,9.3) 24.84,9.3 U1.30
  Bottom Layer w0.152: v2(14.975,12.35) 18.025,9.3 v2(22.097,9.3) v2@22.147,9.3
TX_LED: D3.1 IC1.15 | length 4.7
  Top Layer w0.254: IC1.15 14.225,10.3 15.475,11.55 D3.1
USBDM: C3.1 J1.2 R1.1 | length 4.1
  Top Layer w0.152: J1.2@5.1,8.75 5.575,9.225 R1.1 C3.1
USBDP: C4.1 J1.3 R2.1 | length 3.6
  Top Layer w0.152: J1.3 C4.1 R2.1
XTAL1: C8.1 U1.7 Y1.1 | length 5.4
  Top Layer w0.152: U1.7 31.425,6.265 31.425,3.665 31.665,3.425 Y1.1 C8.1
XTAL2: C9.1 U1.8 Y1.2 | length 4.8
  Top Layer w0.152: U1.8 33.14,6.425 34.14,5.425 Y1.2 C9.1
pads on no net: IC1.2 IC1.6 IC1.14 ICSP.6 ICSP.7 ICSP.MH1 ICSP.MH2 ICSP.MH3 ICSP.MH4 ICSP.MH5 J1. J1.5 U1.1 U1.2 U1.3 U1.6 U1.9 U1.10 U1.11 U1.12 U1.14 U1.19 U1.20 U1.22 U1.23 U1.24 U1.25 U1.26 U1.32 Y1.

## Polygon pours and split planes (outlines as drawn)
GND on Bottom Layer "GND_L02_P002" (solid, pour order 2): 1.775,19.75 22.775,19.75 22.775,18.25 26.275,18.25 26.275,19.75 41.025,19.75 41.025,16 42.525,16 42.525,19.75 47.275,19.75 47.275,17.75 49.275,17.75 49.275,1.75 47.275,1.75 47.275,-0.25 42.525,-0.25 42.525,3.5 41.025,3.5 41.025,-0.25 26.275,-0.25 26.275,1.25 22.775,1.25 22.775,-0.25 1.775,-0.25 1.775,1.75 -0.225,1.75 -0.225,17.75 1.775,17.75
GND on Top Layer "Top Layer-GND" (solid, pour order 10): 22.775,-0.25 22.775,1.25 26.275,1.25 26.275,-0.25 41.025,-0.25 41.025,3.5 42.525,3.5 42.525,-0.25 47.275,-0.25 47.275,1.75 49.275,1.75 49.275,17.75 47.275,17.75 47.275,19.75 42.525,19.75 42.525,16 41.025,16 41.025,19.75 26.275,19.75 26.275,18.25 22.775,18.25 22.775,19.75 21.525,19.75 1.775,19.75 1.775,17.75 -0.225,17.75 -0.225,1.75 1.775,1.75 1.775,-0.25

## Silkscreen, mask and mechanical layers (free items; w line width, h text height)
Top Overlay:
  text "YGN - SpinASM v1.1" at 2.85,0.7 h0.8
Bottom Overlay:
  text "GND" at 45.68,14.138 h1.2
  text "3.3" at 45.675,11.75 h1.2
  text "FV1" at 45.575,9.15 h1.2
  text "SDA" at 45.575,6.65 h1.2
  text "SCL" at 45.575,4.15 h1.2
Mechanical 3:
  lines w0.025: 1.775,0 22.775,0 ; 1.775,0 1.775,0 ; 1.775,0 1.775,1.75 0,1.75 0,17.75 1.775,17.75 1.775,19.5 ; 1.775,19.5 1.775,19.5 ; 1.775,19.5 22.775,19.5 ; 22.775,0 22.775,1.5 ; 22.775,0 22.775,0 ; 22.775,1.5 26.275,1.5 ; 22.775,1.5 22.775,1.5 ; 22.775,18 22.775,19.5 ; 22.775,18 22.775,18 ; 22.775,18 26.275,18 26.275,19.5 41.025,19.5 41.025,15.75 42.525,15.75 42.525,19.5 47.025,19.5 47.025,17.5 49.025,17.5 49.025,2 47.025,2 47.025,0 42.525,0 42.525,3.75 41.025,3.75 41.025,0 ; 22.775,19.5 22.775,19.5 ; 26.275,0 41.025,0 ; 26.275,0 26.275,0 ; 26.275,0 26.275,1.5 ; 26.275,1.5 26.275,1.5 ; 41.025,0 41.025,0